# EAGLE board powerPanel (EAGLE 4.16)
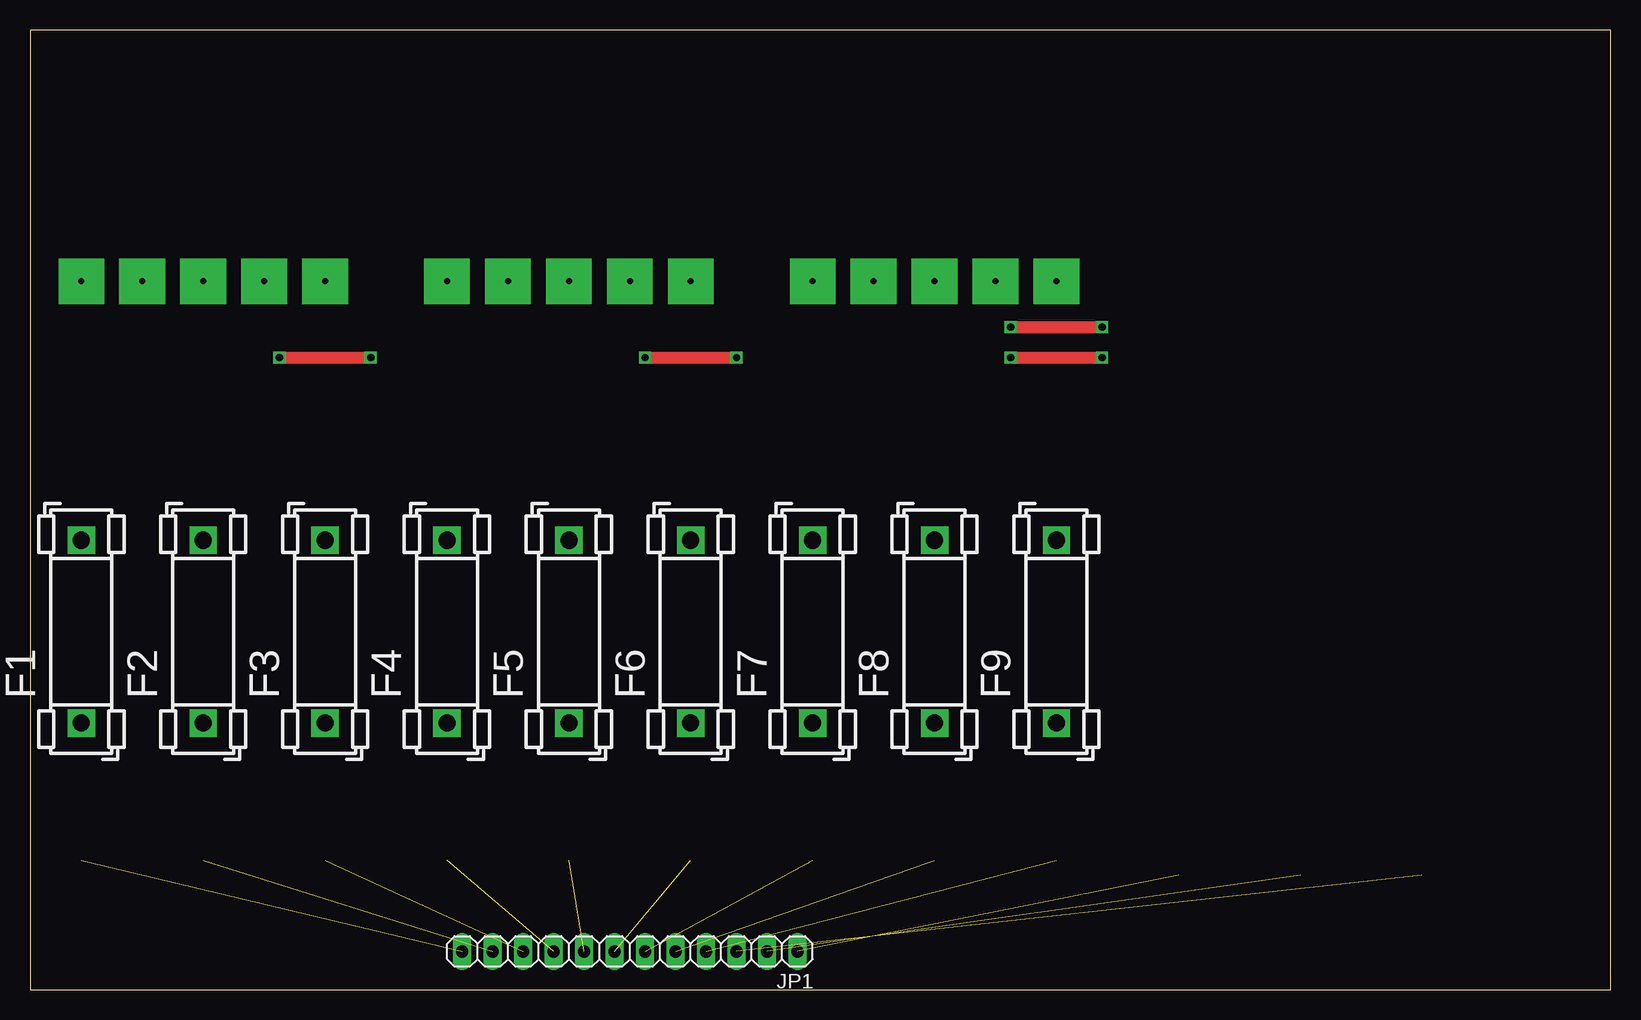
[diagram p0: board, top side]
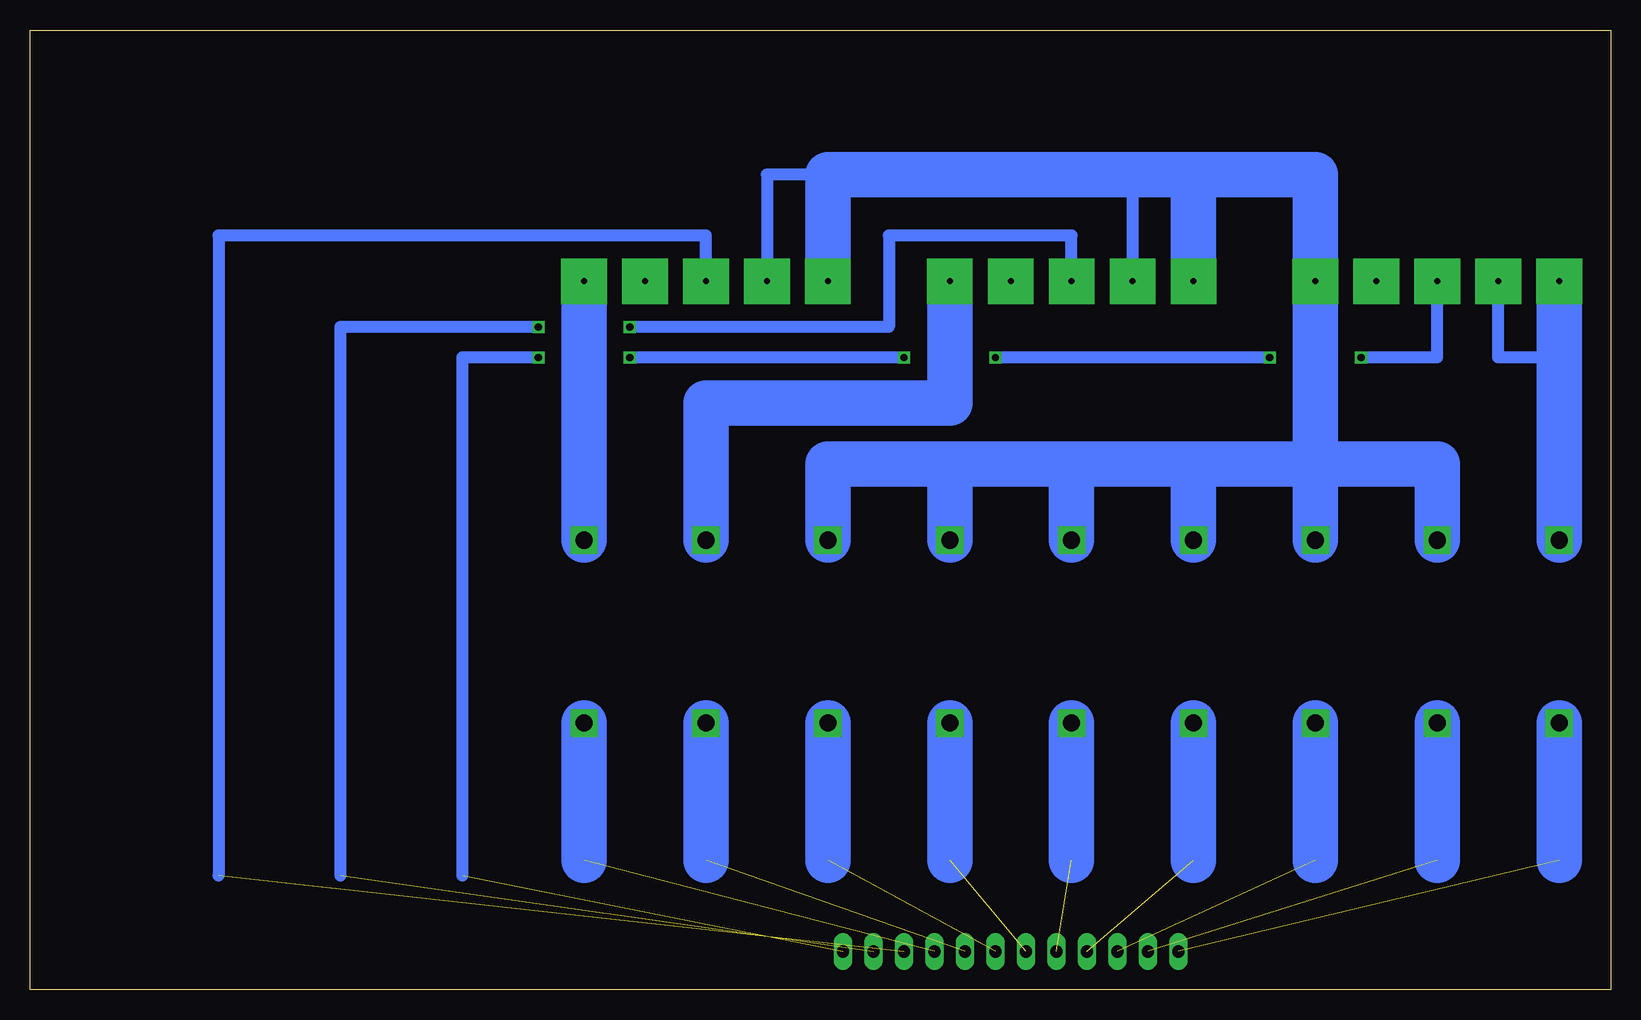
[diagram p1: board, bottom side, seen from below]

Size 131.75 x 80 mm. Coordinates in mm from the lower left corner, seen from the top.
Outline: 0,0 131.75,0 131.75,80 0,80 0,0
Copper layers (1*16): Top 0.035mm / dielectric 1.5mm / Bottom 0.035mm
Design rules "default": minimum track width 10mil, minimum drill 24mil, track to track 8mil, track to pad 8mil, pad to pad 8mil, via to via 8mil, smd to smd 8mil, copper to edge 40mil, drill to drill 8mil, minimum pad ring 10mil, minimum via ring 8mil, stop-mask expansion 4mil, vias tented up to drill 0mil, thermal gap 10mil

## Footprints (pad centres in the part's own frame; a part is rotated, then mirrored left to right if it is on the bottom)
RELAY5 = drill 0.5 pad 3.81 square: 30 -10.16,0; 85 0,0; 86 -5.08,0; 87 10.16,0; 87A 5.08,0
FUSE_HOLDER_5X20MM = drill 1.422 pad 2.286 square: 1 0,0; 2 15.24,0
1X12 = drill 1.016 long: 1 -13.97,0; 2 -11.43,0; 3 -8.89,0; 4 -6.35,0; 5 -3.81,0; 6 -1.27,0; 7 1.27,0; 8 3.81,0; 9 6.35,0; 10 8.89,0; 11 11.43,0; 12 13.97,0

## Placement (x,y rotation side)
1  RELAY  [RELAY5]  75.4,59.05 0 top
2  RELAY  [RELAY5]  44.92,59.05 0 top
3  RELAY  [RELAY5]  14.44,59.05 0 top
F1  MAIN  [FUSE_HOLDER_5X20MM]  4.28,22.22 90 top
F2  INJ A  [FUSE_HOLDER_5X20MM]  14.44,22.22 90 top
F3  INJ B  [FUSE_HOLDER_5X20MM]  24.6,22.22 90 top
F4  IGN  [FUSE_HOLDER_5X20MM]  34.76,22.22 90 top
F5  EL  [FUSE_HOLDER_5X20MM]  44.92,22.22 90 top
F6  SPARE1  [FUSE_HOLDER_5X20MM]  55.08,22.22 90 top
F7  SPARE2  [FUSE_HOLDER_5X20MM]  65.24,22.22 90 top
F8  FAN  [FUSE_HOLDER_5X20MM]  75.4,22.22 90 top
F9  FUEL  [FUSE_HOLDER_5X20MM]  85.56,22.22 90 top
JP1  [1X12]  50,3.17 180 top

## Library data of the parts
1-3 = unicorn
F1-F9 = fuse
JP1 = pinhead

## Nets
N$1: F1.1 JP1.12
N$2: 3.30 3.86 F1.2
N$3: 1.30 1.86 2.30 2.86 3.87 F2.2 F3.2 F4.2 F5.2 F6.2 F7.2
N$4: 1.87 F9.2
N$5: F7.1 JP1.6
N$6: F2.1 JP1.11
N$7: F3.1 JP1.10
N$8: F4.1 JP1.9
N$9: 2.87 F8.2
N$10: F5.1 JP1.8
N$11: F6.1 JP1.7
N$12: F8.1 JP1.5
N$13: F9.1 JP1.4
N$14: 3.85 JP1.1
N$15: 2.85 JP1.2
N$16: 1.85 JP1.3

## Tracks (layer width: path | path; a pad name or v marks a point on that pad's centre or on a via)
N$1  (1 unrouted)
  Bottom 3.81: 4.28,10.79 F1.1
N$2
  Bottom 1.016: 3.86 9.36,52.7 4.28,52.7
  Bottom 3.81: F1.2 4.28,52.7 3.30
N$3
  Bottom 1.016: 39.84,67.94 2.86 | 1.86 70.32,67.94 65.24,67.94
  Bottom 3.81: 24.6,43.81 34.76,43.81 | F2.2 14.44,43.81 24.6,43.81 | 34.76,43.81 F4.2 | 34.76,43.81 44.92,43.81 | 44.92,43.81 F5.2 | 44.92,43.81 55.08,43.81 | 55.08,43.81 F6.2 | 55.08,43.81 65.24,43.81 F7.2 | 24.6,43.81 F3.2 | 24.6,43.81 3.87 24.6,67.94 34.76,67.94 | 34.76,67.94 2.30 | 1.30 65.24,67.94 39.84,67.94 34.76,67.94
N$4
  Bottom 3.81: F9.2 1.87
N$5  (1 unrouted)
  Bottom 3.81: 65.24,10.79 F7.1
N$6  (1 unrouted)
  Bottom 3.81: 14.44,10.79 F2.1
N$7  (1 unrouted)
  Bottom 3.81: 24.6,10.79 F3.1
N$8  (1 unrouted)
  Bottom 3.81: 34.76,10.79 F4.1
N$9
  Bottom 3.81: F8.2 75.4,48.89 55.08,48.89 2.87
N$10  (1 unrouted)
  Bottom 3.81: 44.92,10.79 F5.1
N$11  (1 unrouted)
  Bottom 3.81: 55.08,10.79 F6.1
N$12  (1 unrouted)
  Bottom 3.81: 75.4,10.79 F8.1
N$13  (1 unrouted)
  Bottom 3.81: 85.56,10.79 F9.1
N$14  (via drill 0.6)  (1 unrouted)
  Top 1.016: v20.79,52.7 v28.41,52.7 | v51.27,52.7 v58.89,52.7 | v81.75,52.7 v89.37,52.7
  Bottom 1.016: 3.85 14.44,52.7 v20.79,52.7 | v28.41,52.7 v51.27,52.7 | v58.89,52.7 v81.75,52.7 | v89.37,52.7 95.72,52.7 95.72,9.52
N$15  (via drill 0.6)  (1 unrouted)
  Top 1.016: v81.75,55.24 v89.37,55.24
  Bottom 1.016: 2.85 44.92,62.86 60.16,62.86 60.16,55.24 v81.75,55.24 | v89.37,55.24 105.88,55.24 105.88,9.52
N$16  (1 unrouted)
  Bottom 1.016: 1.85 75.4,62.86 116.04,62.86 116.04,9.52